# EAGLE board 5Wled-driver_001 (EAGLE 6.2)
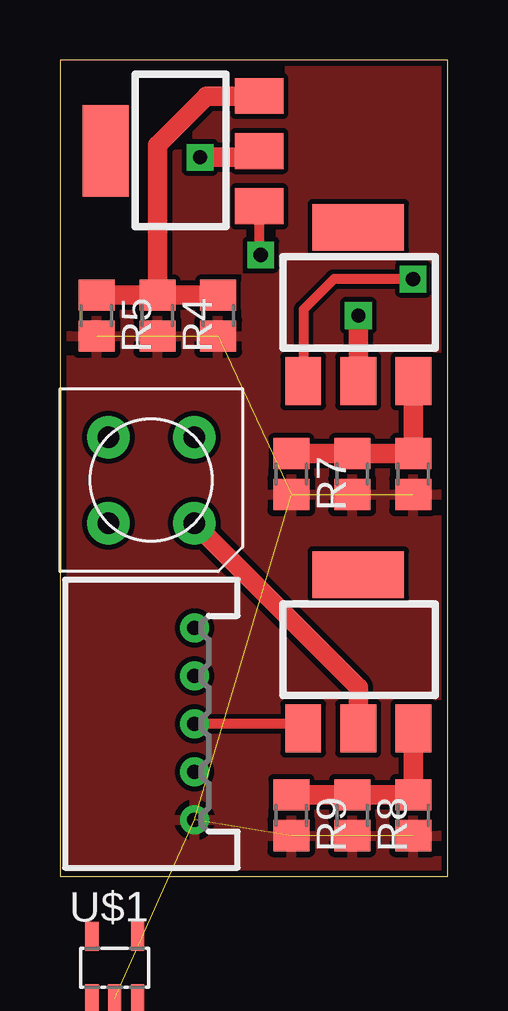
[diagram p0: board, top side]
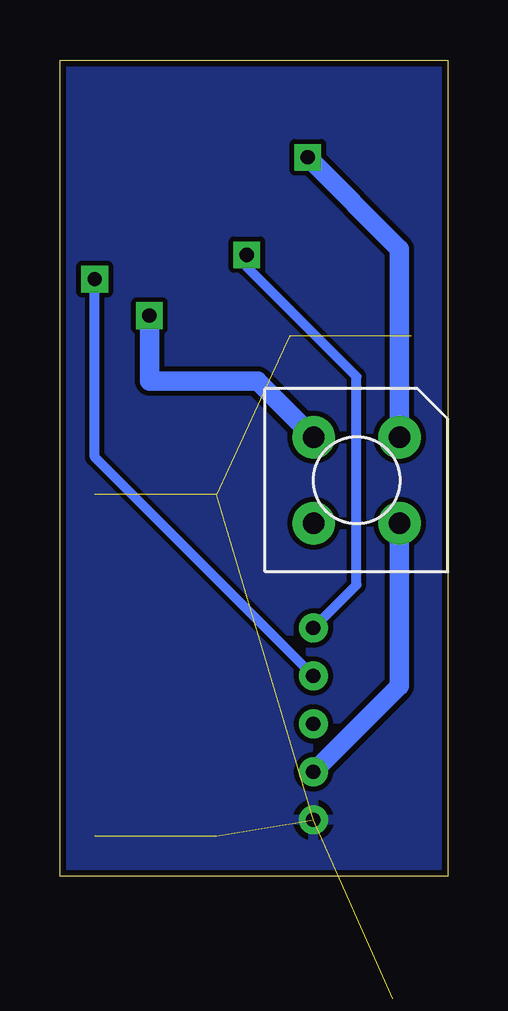
[diagram p1: board, bottom side, seen from below]

Size 16.18 x 34.03 mm. Coordinates in mm from the lower left corner, seen from the top.
Outline: 0,0 16.18,0 16.18,34.03 0,34.03 0,0
Copper layers (1*16): Top 0.035mm / dielectric 1.5mm / Bottom 0.035mm
Design rules: minimum track width 8mil, minimum drill 20mil, track to track 8mil, track to pad 8mil, pad to pad 8mil, via to via 8mil, smd to smd 8mil, copper to edge 10mil, drill to drill 8mil, minimum pad ring 12mil, minimum via ring 10mil, stop-mask expansion 4mil, vias tented up to drill 25mil, thermal gap 10mil

## Footprints (pad centres in the part's own frame; a part is rotated, then mirrored left to right if it is on the bottom)
5WRGBLED = drill 0.9 pad 1.778: 1 -1.79,1.79; 2 -1.79,-1.79; 3 1.79,-1.79; 4 1.79,1.79
DF3R-05 = drill 0.6: 1 -4,1.8; 2 -2,1.8; 3 0,1.8; 4 2,1.8; 5 4,1.8
SOT-223 = smd 1.499 x 2.007: 1 -2.3,-3.235; 2 0,-3.235; 3 2.3,-3.235 | smd 3.81 x 1.93: 4 0,3.175
R2012 = smd 1.3 x 1.5: 1 -0.85,0; 2 0.85,0
SOT23-5L = smd 0.55 x 1.2: 1 -0.95,-1.3; 2 0,-1.3; 3 0.95,-1.3; 4 0.95,1.3; 5 -0.95,1.3

## Placement (x,y rotation side)
LED1  RGBLED_CA4.5MM  [5WRGBLED]  3.81,16.51 180 top
PL1  [DF3R-05]  3.81,6.35 270 top
Q1  IRLL024  [SOT-223]  5.08,30.23 90 top
Q2  IRLL024  [SOT-223]  12.45,9.4 0 top
Q3  IRLL024  [SOT-223]  12.45,23.88 0 top
R1  [R2012]  6.6,23.37 270 top
R2  [R2012]  14.73,16.76 270 top
R3  [R2012]  14.73,2.54 270 top
R4  [R2012]  4.06,23.37 270 top
R5  [R2012]  1.52,23.37 270 top
R6  [R2012]  12.19,16.76 270 top
R7  [R2012]  9.65,16.76 270 top
R8  [R2012]  12.19,2.54 270 top
R9  [R2012]  9.65,2.54 270 top
U$1  TPS61040DBV  [SOT23-5L]  2.29,-3.81 0 top

## Library data of the parts
LED1 R1-R9 U$1 = adafruit
PL1 = con-hirose-df3
Q1-Q3 = transistors

## Nets
BLUE: PL1.1 Q1.1
GND: PL1.5 R1.2 R2.2 R3.2 R4.2 R5.2 R6.2 R7.2 R8.2 R9.2 U$1.2
GREEN: PL1.2 Q3.1
N$1: LED1.3 Q1.2
N$2: LED1.1 Q2.2
N$3: LED1.2 Q3.2
N$4: Q1.3 R1.1 R4.1 R5.1
N$5: Q3.3 R2.1 R6.1 R7.1
N$6: Q2.3 R3.1 R8.1 R9.1
RED: PL1.3 Q2.1
VCC: LED1.4 PL1.4
VIN: U$1.5

## Tracks (layer width: path | path; a pad name or v marks a point on that pad's centre or on a via)
BLUE  (via drill 0.6)
  Top 0.406: v8.38,25.91 8.32,25.97 Q1.1
  Bottom 0.406: PL1.1 3.81,12.15 3.81,20.83 8.38,25.4 v8.38,25.91
GND  (10 unrouted)
  pour Bottom: 0,34.04 16.51,34.04 16.51,33.78 16.51,0 0,0
  pour Top: 0.25,34.04 16.26,34.04 16.26,33.53 16.26,0 0,0 0,34.04
GREEN  (via drill 0.6)
  Top 0.406: v14.73,24.89 11.43,24.89 10.16,23.62 10.16,20.65 Q3.1
  Bottom 0.406: PL1.2 14.73,17.47 v14.73,24.89
N$1  (via drill 0.6)
  Top 0.813: Q1.2 8.06,29.97 v5.84,29.97
  Bottom 0.813: v5.84,29.97 2.02,26.15 LED1.3
N$2
  Top 0.813: Q2.2 12.45,7.87 LED1.1
N$3  (via drill 0.6)
  Top 0.813: v12.45,23.37 Q3.2
  Bottom 0.813: LED1.2 7.94,20.64 Q3.2 v12.45,23.37
N$4
  Top 0.813: Q1.3 6.11,32.53 4.06,30.48 R4.1 | R4.1 R5.1 | R4.1 R1.1
N$5
  Top 0.813: R7.1 R6.1 R2.1 14.75,17.63 Q3.3
N$6
  Top 0.813: Q2.3 14.75,3.4 R3.1 R8.1 R9.1
RED
  Top 0.406: Q2.1 9.96,6.35 PL1.3
VCC
  Bottom 0.813: LED1.4 2.02,7.94 PL1.4